# EAGLE board Navigationmark1 (EAGLE 9.6.2)
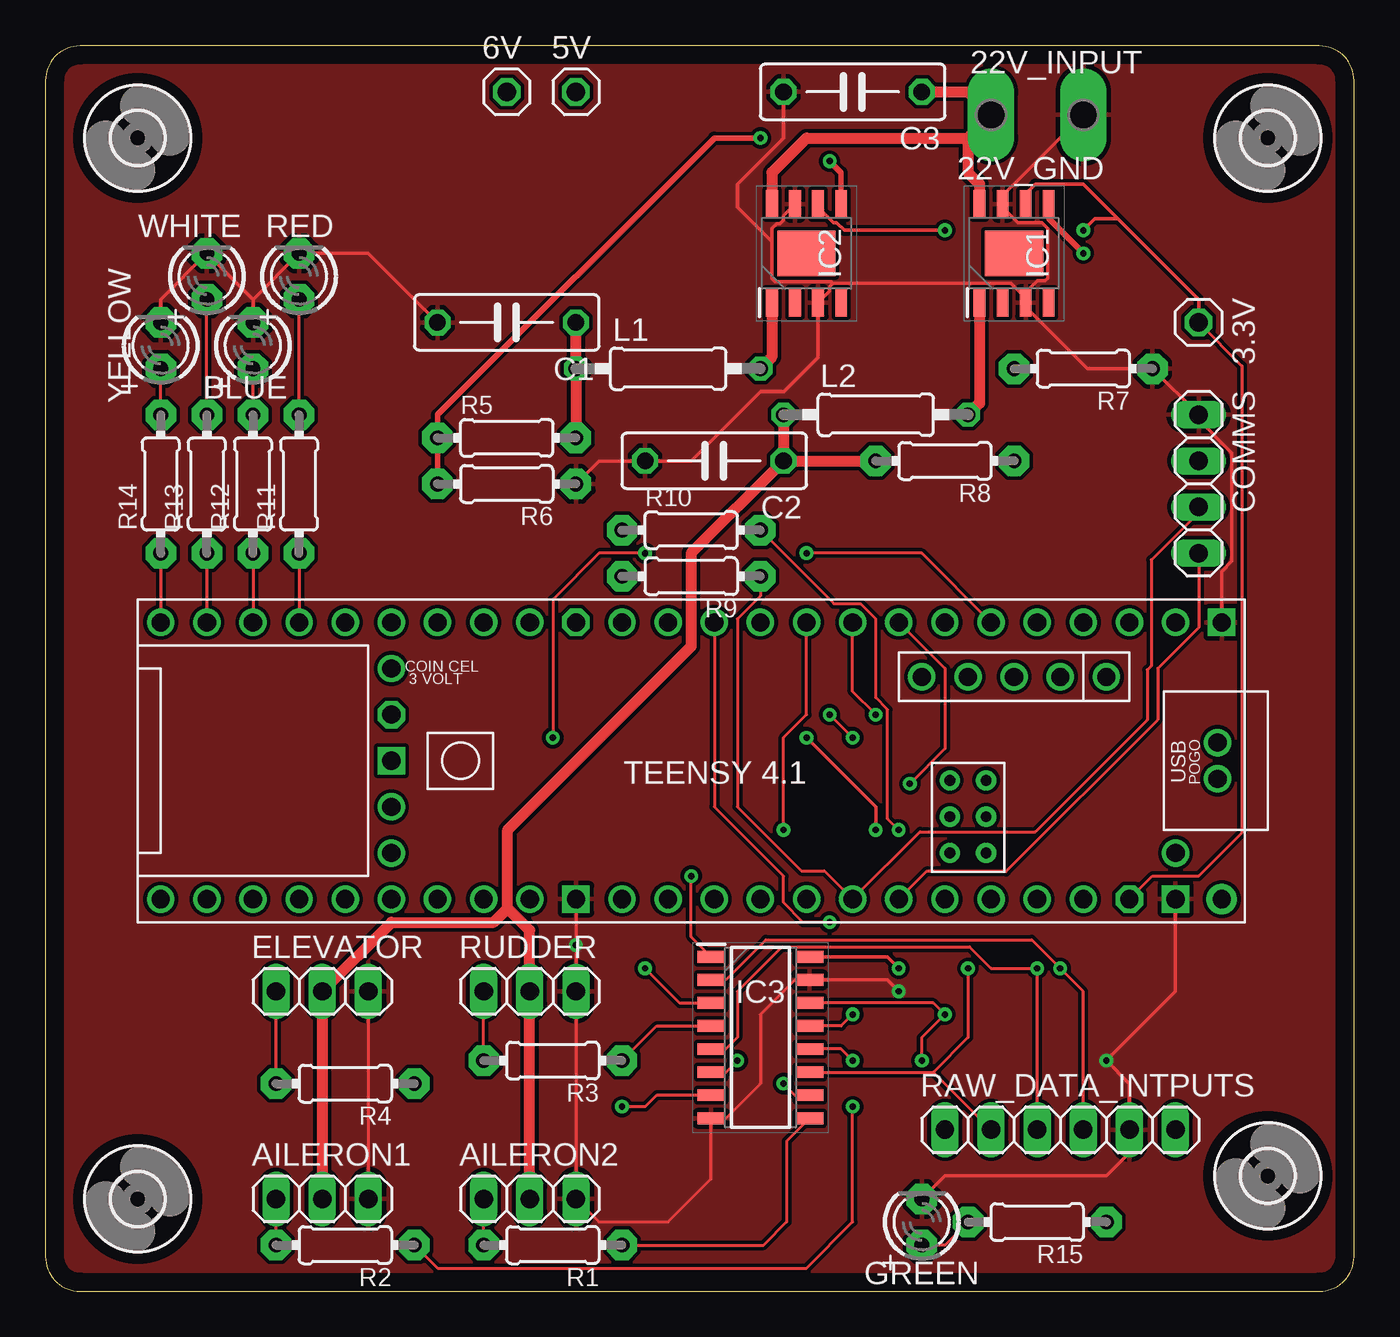
[diagram p0: board, top side]
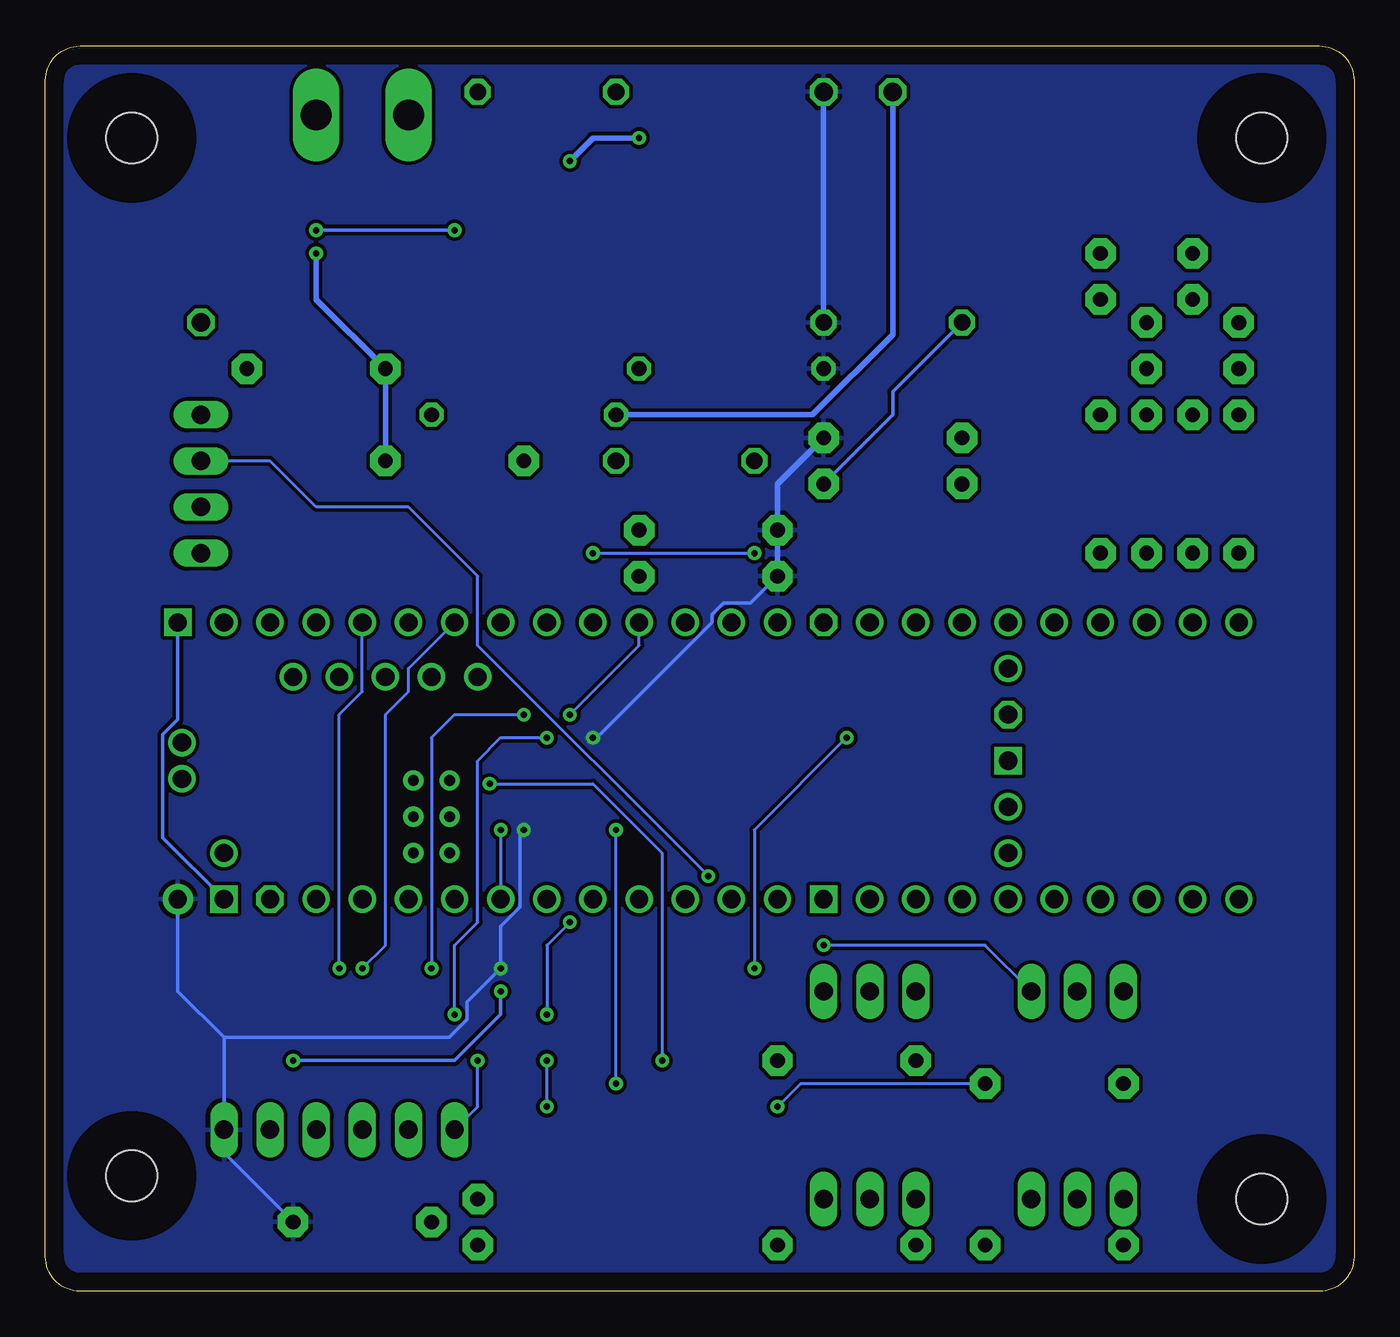
[diagram p1: board, bottom side, seen from below]

Size 72.06 x 68.57 mm. Coordinates in mm from the lower left corner, seen from the top.
Outline: 70.16,68.57 1.9,68.57 arc90 0,66.67 0,1.9 arc90 1.9,0 70.16,0 arc90 72.06,1.9 72.06,66.67 arc90 70.16,68.57
Copper layers (1*16): Top 0.035mm / dielectric 1.5mm / Bottom 0.035mm
Design rules "default *": minimum track width 6mil, minimum drill 0.35mm, track to track 8mil, track to pad 8mil, pad to pad 6mil, via to via 6mil, smd to smd 6mil, copper to edge 40mil, drill to drill 6mil, minimum pad ring 10mil, minimum via ring 8mil, stop-mask expansion 4mil, vias tented up to drill 0mil, thermal gap 10mil

## Footprints (pad centres in the part's own frame; a part is rotated, then mirrored left to right if it is on the bottom)
1X01 = drill 1.016 octagon: 1 0,0
P1-17Y = drill 1.702 pad 2.121 long: TP 0,0
1X03 = drill 1.016 long: 1 -2.54,0; 2 0,0; 3 2.54,0
LED3MM = drill 0.813 pad 1.676 octagon: A -1.27,0; K 1.27,0
C075-032X103 = drill 0.914 octagon: 1 -3.81,0; 2 3.81,0
1X04 = drill 1.016 long: 1 -3.81,0; 2 -1.27,0; 3 1.27,0; 4 3.81,0
SOIC127P600X170-9N = smd 1.525 x 0.65: 1 -2.712,1.905; 2 -2.712,0.635; 3 -2.712,-0.635; 4 -2.712,-1.905; 5 2.712,-1.905; 6 2.712,-0.635; 7 2.712,0.635; 8 2.712,1.905 | smd 2.51 x 3.2: 9 0,0
SOIC127P600X175-16N = smd 1.525 x 0.65: 1 -2.712,4.445; 2 -2.712,3.175; 3 -2.712,1.905; 4 -2.712,0.635; 5 -2.712,-0.635; 6 -2.712,-1.905; 7 -2.712,-3.175; 8 -2.712,-4.445; 9 2.712,-4.445; 10 2.712,-3.175; 11 2.712,-1.905; 12 2.712,-0.635; 13 2.712,0.635; 14 2.712,1.905; 15 2.712,3.175; 16 2.712,4.445
0207/10 = drill 0.813 octagon: 1 -5.08,0; 2 5.08,0
0204/7 = drill 0.813 pad 1.676 octagon: 1 -3.81,0; 2 3.81,0
1X06 = drill 1.016 long: 1 -6.35,0; 2 -3.81,0; 3 -1.27,0; 4 1.27,0; 5 3.81,0; 6 6.35,0
TEENSY41 = drill 1: 0-RX1/CS1/CRX2 -27.94,-7.62; 1-TX1/MISO1/CTX2 -25.4,-7.62; 2-OUT2 -22.86,-7.62; 3-LRCLK2 -20.32,-7.62; 4-BCLK2 -17.78,-7.62; 5-IN2 -15.24,-7.62; 6-OUT1D -12.7,-7.62; 7-RX2/OUT1A -10.16,-7.62; 8-TX2/IN1 -7.62,-7.62; 9-OUT1C -5.08,-7.62; 10-CS\MQSR -2.54,-7.62; 11-MOSI/CTX1 0,-7.62; 12-MISO/MQSL 2.54,-7.62; 13-SCK/LED 2.54,7.62; 14-A0/TX3/SPDIF_OUT 0,7.62; 15-A1/RX3/SPDIF_IN -2.54,7.62; 16-A2/RX4/SCL1 -5.08,7.62; 17-A3/TX4/SDA1 -7.62,7.62; 18-A4/SDA0 -10.16,7.62; 19-A5/SCL0 -12.7,7.62; 20-A6/TX5/LRCLK1 -15.24,7.62; 21-A7/RX5/BCLK1 -17.78,7.62; 22-A8/CTX1 -20.32,7.62; 23-A9/CRX1/MCLK1 -22.86,7.62; 24-A10/TX6/SCL2 7.62,-7.62; 25-A11/RX6/SDA2 10.16,-7.62; 26-A12/MOSI1 12.7,-7.62; 27-A13/SCK1 15.24,-7.62; 28-RX7 17.78,-7.62; 29-TX7 20.32,-7.62; 30-CRX3 22.86,-7.62; 31-CTX3 25.4,-7.62; 32-OUT1B 27.94,-7.62; 33-MCLK2 27.94,7.62; 34-RX8 25.4,7.62; 35-TX8 22.86,7.62; 36-PWM 20.32,7.62; 37-PWM 17.78,7.62; 38-A14/CS/IN1 15.24,7.62; 39-A15/CS/OUT1A 12.7,7.62; 40-A16/CS1 10.16,7.62; 41-A17/MISO1 7.62,7.62; +5V -24.13,-4.62; D+ -30.25,-1; D- -30.25,1; DM -21.59,-4.62; DP -19.05,-4.62; GND4 -16.51,-4.62; GND5 -13.97,-4.62; ON/OFF 15.24,5.08; PROGRAM 15.24,2.54; VBAT 15.24,-5.08; VUSB -27.94,5.08 | drill 1 octagon: 3V3-1 5.08,-7.62; 3V3-2 15.24,-2.54; 3V3-3 -25.4,7.62 | drill 0.6: G -15.51,3.08; LED -17.51,3.08; R+ -17.51,5.08; R- -15.51,5.08; T+ -15.51,1.08; T- -17.51,1.08 | drill 1 square: GND1 -30.48,-7.62; GND2 15.24,0; GND3 5.08,7.62; GND6 -27.94,7.62 | drill 1 pad 1.676: VIN -30.48,7.62
2,8 = hole 2.8: 0,0

## Placement (x,y rotation side)
3.3V  [1X01]  63.5,53.34 270 top
5V  [1X01]  29.21,66.04 0 top
6V  [1X01]  25.4,66.04 0 top
22V_GND  TPPAD1-17Y  [P1-17Y]  57.15,64.77 180 top
22V_INPUT  TPPAD1-17Y  [P1-17Y]  52.07,64.77 0 top
AILERON1  [1X03]  15.24,5.08 0 top
AILERON2  [1X03]  26.67,5.08 0 top
BLUE  [LED3MM]  11.43,52.07 90 top
C1  470uF  [C075-032X103]  25.4,53.34 180 top
C2  470uF  [C075-032X103]  36.83,45.72 180 top
C3  10uF  [C075-032X103]  44.45,66.04 180 top
COMMS  [1X04]  63.5,44.45 270 top
ELEVATOR  [1X03]  15.24,16.51 0 top
GREEN  [LED3MM]  48.26,3.81 90 top
IC1  A5975D  [SOIC127P600X170-9N]  53.34,57.15 90 top
IC2  A5975D  [SOIC127P600X170-9N]  41.91,57.15 90 top
IC3  CD74AC257M96  [SOIC127P600X175-16N]  39.37,13.97 0 top
L1  27uH  [0207/10]  34.29,50.8 0 top
L2  27uH  [0207/10]  45.72,48.26 0 top
R1  220  [0204/7]  27.94,2.54 180 top
R2  220  [0204/7]  16.51,2.54 180 top
R3  220  [0204/7]  27.94,12.7 180 top
R4  220  [0204/7]  16.51,11.43 180 top
R5  1k  [0204/7]  25.4,46.99 0 top
R6  3k  [0204/7]  25.4,44.45 180 top
R7  1.5k  [0204/7]  57.15,50.8 180 top
R8  5.6k  [0204/7]  49.53,45.72 180 top
R9  4.7k  [0204/7]  35.56,39.37 180 top
R10  4.7k  [0204/7]  35.56,41.91 0 top
R11  150  [0204/7]  13.97,44.45 90 top
R12  80  [0204/7]  11.43,44.45 90 top
R13  90  [0204/7]  8.89,44.45 90 top
R14  150  [0204/7]  6.35,44.45 90 top
R15  150  [0204/7]  54.61,3.81 180 top
RAW_DATA_INTPUTS  [1X06]  55.88,8.89 0 top
RED  [LED3MM]  13.97,55.88 90 top
RUDDER  [1X03]  26.67,16.51 0 top
U$1  TEENSY41  [TEENSY41]  34.29,29.21 180 top
U$2  [2,8]  67.31,6.35 0 top
U$3  [2,8]  5.08,5.08 0 top
U$4  [2,8]  5.08,63.5 0 top
U$5  [2,8]  67.31,63.5 0 top
WHITE  [LED3MM]  8.89,55.88 90 top
YELLOW  [LED3MM]  6.35,52.07 90 top

## Library data of the parts
3.3V 5V 6V AILERON1 AILERON2 COMMS ELEVATOR RAW_DATA_INTPUTS RUDDER = pinhead
22V_GND 22V_INPUT = testpad
BLUE C1-C3 GREEN R1-R15 RED WHITE YELLOW = adafruit
IC1 IC2 = A5975D; ARROW_PART_NUMBER: A5975D; ARROW_PRICE-STOCK: https://www.arrow.com/en/products/a5975d/stmicroelectronics; DESCRIPTION: STMICROELECTRONICS - A5975D - DC/DC Boost Regulator, Adjustable, AEC-Q100, 4V to 36V In, 1.235V to 35V/3A Out, 250 kHz, PowerSO-8; HEIGHT: 1.7mm; MANUFACTURER_NAME: STMicroelectronics; MANUFACTURER_PART_NUMBER: A5975D; MOUSER_PART_NUMBER: 511-A5975D; MOUSER_PRICE-STOCK: https://www.mouser.co.uk/ProductDetail/STMicroelectronics/A5975D?qs=LYO3r17CQdO66PebjUe%2FOA%3D%3D
IC3 = CD74AC257M96; DESCRIPTION: Quad 2-Input Non-Inverting Multiplexers with 3-State Outputs; HEIGHT: 1.75mm; MANUFACTURER_NAME: Texas Instruments; MANUFACTURER_PART_NUMBER: CD74AC257M96; MOUSER_PART_NUMBER: 595-CD74AC257M96; MOUSER_PRICE-STOCK: https://www.mouser.com/Search/Refine.aspx?Keyword=595-CD74AC257M96
L1 L2 = rcl; SPICEPREFIX: L
U$1 = teensy
U$2-U$5 = holes

## Nets
3.3V: 3.3V.1 IC1.6 IC2.6 U$1.3V3-3
5V: 5V.1 C1.1 IC3.16 L1.1 R5.2 R9.2 R10.1 R15.1 RAW_DATA_INTPUTS.6 U$1.VIN
6V: 6V.1 AILERON1.2 AILERON2.2 C2.1 ELEVATOR.2 L2.1 R8.2 RUDDER.2
22V: 22V_INPUT.TP C3.1 IC1.8 IC2.8
AILERON1_SIGNAL: IC3.12 R2.1
AILERON2_SIGNAL: IC3.9 R1.1
BLUE_LED: R12.1 U$1.30-CRX3
ELEVATOR_SIGNAL: IC3.7 R4.1
FILTERED_AILERON1: IC3.10 U$1.8-TX2/IN1
FILTERED_AILERON2: IC3.13 U$1.10-CS\MQSR
FILTERED_ELEV: IC3.6 U$1.6-OUT1D
FILTERED_RUD: IC3.3 U$1.4-BCLK2
GND: 22V_GND.TP AILERON1.3 AILERON2.3 BLUE.K C1.2 C2.2 C3.2 COMMS.1 ELEVATOR.3 GREEN.K IC1.3 IC1.7 IC2.3 IC2.7 IC3.8 IC3.15 R6.1 R7.1 RAW_DATA_INTPUTS.5 RED.K RUDDER.3 U$1.GND1 U$1.GND3 U$1.GND6 WHITE.K YELLOW.K
N$1: AILERON1.1 R2.2
N$2: GREEN.A R15.2
N$4: AILERON2.1 R1.2
N$7: R3.2 RUDDER.1
N$8: IC1.1 L2.2
N$9: R11.2 RED.A
N$10: ELEVATOR.1 R4.2
N$11: IC2.1 L1.2
N$12: IC2.5 R5.1 R6.2
N$14: IC1.5 R7.2 R8.1
N$15: BLUE.A R12.2
N$16: R13.2 WHITE.A
N$17: R14.2 YELLOW.A
RAW_AILERON1_DATA: IC3.11 RAW_DATA_INTPUTS.2 U$1.7-RX2/OUT1A
RAW_AILERON2_DATA: IC3.14 RAW_DATA_INTPUTS.1 U$1.9-OUT1C
RAW_ELEV_DATA: IC3.5 RAW_DATA_INTPUTS.3 U$1.5-IN2
RAW_RUD_DATA: IC3.2 RAW_DATA_INTPUTS.4 U$1.3-LRCLK2
RED_LED: R11.1 U$1.29-TX7
RUDDER_SIGNAL: IC3.4 R3.1
SCL: COMMS.4 R10.2 U$1.19-A5/SCL0
SDA: COMMS.3 R9.1 U$1.18-A4/SDA0
SELECT_PIN: COMMS.2 IC3.1
WHITE_LED: R13.1 U$1.31-CTX3
YELLOW_LED: R14.1 U$1.32-OUT1B

## Tracks (layer width: path | path; a pad name or v marks a point on that pad's centre or on a via)
3.3V  (via drill 0.35)
  Top 0.152: 3.3V.1 65.89,50.95 65.89,25.25 63.5,22.86 60.96,22.86 U$1.3V3-3
  Top 0.203: IC1.6 53.98,60.43 54.51,60.96 57.15,60.96 59.05,59.06 | 3.3V.1 63.5,54.61 59.05,59.06 | v49.53,58.42 43.99,58.42 43.56,58.84 43.38,58.84 42.54,59.69 IC2.6 | v57.15,58.42 57.79,59.06 59.05,59.06
  Bottom 0.203: v49.53,58.42 v57.15,58.42
5V  (via drill 0.35)
  Top 0.203: v41.91,30.48 45.72,26.67 v45.72,25.4 | v46.99,17.78 46.35,18.41 IC3.16
  Top 0.61: C1.1 L1.1 R5.2
  Bottom 0.203: R9.2 33.23,37.89 34.73,37.89 35.35,37.27 35.35,36.81 41.68,30.48 v41.91,30.48 | v45.72,25.4 45.93,25.19 45.93,21.15 46.99,20.09 v46.99,17.78 48.85,15.92 48.85,14.96 49.83,13.97 62.23,13.97 | 62.23,13.97 RAW_DATA_INTPUTS.6 62.23,7.62 R15.1 | U$1.VIN 64.77,16.51 62.23,13.97
  Bottom 0.305: C1.1 5V.1 | R5.2 31.75,44.45 R9.2 R10.1
  pour Bottom: 70.48,68.58 1.9,68.58 arc90 0,66.67 0,1.9 arc90 1.9,0 70.48,0 arc90 72.39,1.9 72.39,66.67 arc90
6V
  Top 0.61: L2.1 C2.1 | C2.1 R8.2 | AILERON1.2 ELEVATOR.2 19.05,20.32 24.69,20.32 25.46,21.09 | AILERON2.2 RUDDER.2 26.67,19.88 25.46,21.09 | 25.46,21.09 25.46,25.4 35.56,35.5 35.56,40.64 C2.1
  Bottom 0.305: L2.1 29.82,48.26 25.4,52.68 6V.1
22V
  Top 0.61: IC2.8 40.01,61.59 41.91,63.5 50.8,63.5 | C3.1 50.8,66.04 22V_INPUT.TP 50.8,63.5 | IC1.8 51.43,60.96 50.8,61.59 50.8,63.5
AILERON1_SIGNAL  (via drill 0.35)
  Top 0.152: R2.1 21.59,1.27 41.91,1.27 44.45,3.81 v44.45,10.16 | IC3.12 43.81,13.34 v44.45,12.7
  Bottom 0.152: v44.45,10.16 v44.45,12.7
AILERON2_SIGNAL
  Top 0.152: R1.1 39.54,2.54 40.81,3.81 40.81,8.25 IC3.9
BLUE_LED
  Top 0.152: R12.1 U$1.30-CRX3
ELEVATOR_SIGNAL  (via drill 0.35)
  Top 0.152: IC3.7 33.65,10.79 33.02,10.16 v31.75,10.16
  Bottom 0.152: R4.1 30.48,11.43 v31.75,10.16
FILTERED_AILERON1  (via drill 0.35)
  Top 0.152: U$1.8-TX2/IN1 41.91,31.75 40.64,30.48 v40.64,25.4 | v40.64,11.43 41.27,10.79 IC3.10
  Bottom 0.152: v40.64,11.43 v40.64,25.4
FILTERED_AILERON2  (via drill 0.35)
  Top 0.152: U$1.10-CS\MQSR 36.83,26.67 40.64,22.86 40.64,21.4 41.72,20.32 v43.18,20.32 | v44.45,15.24 43.81,14.61 IC3.13
  Bottom 0.152: v43.18,20.32 44.45,19.05 v44.45,15.24
FILTERED_ELEV  (via drill 0.35)
  Top 0.152: U$1.6-OUT1D 49.53,34.29 49.53,29.87 v47.6,27.94 | v38.1,12.7 37.46,12.07 IC3.6
  Bottom 0.152: v47.6,27.94 41.91,27.94 38.1,24.13 v38.1,12.7
FILTERED_RUD  (via drill 0.35)
  Top 0.152: U$1.4-BCLK2 48.26,40.64 v41.91,40.64 | v33.02,40.64 30.48,40.64 27.94,38.1 v27.94,30.48 | v33.02,17.78 34.92,15.88 IC3.3
  Bottom 0.152: v41.91,40.64 v33.02,40.64 | v27.94,30.48 33.02,25.4 v33.02,17.78
GND  (via drill 0.35)
  Top 0.152: 52.7,59.72 IC1.7 | ELEVATOR.3 AILERON1.3 | IC3.15 41.27,17.14 39.37,15.24 39.37,11.43 37.46,9.52 IC3.8 36.66,6.18 34.29,3.81 30.48,3.81 AILERON2.3 RUDDER.3 v29.21,19.05 U$1.GND3 | 53.98,54.26 54.12,54.12
  Top 0.203: IC1.7 52.7,60.33 22V_GND.TP | C3.2 40.64,63.5 38.1,60.96 38.1,59.69 40.01,57.78 | 53.98,54.58 IC1.3 | 53.89,54.35 54.12,54.12 | IC1.3 53.98,55.01 | 53.98,55.01 54.61,55.64 55.04,55.64 55.19,55.79 55.19,58.51 54.86,58.84 53.54,58.84 52.7,59.69 52.7,59.72 | R6.1 30.48,45.72 C2.2 35.56,45.72 39.37,49.53 40.66,49.53 42.54,51.41 IC2.3 43.18,55.08 43.18,55.33 43.36,55.51 | C1.2 17.78,57.15 RED.K 11.43,54.61 | 11.43,54.61 BLUE.K | 11.43,54.61 WHITE.K 6.35,54.61 YELLOW.K | IC1.3 53.98,54.26 53.98,54.19 57.36,50.8 R7.1 COMMS.1 63.5,47.99 65.33,46.16 65.33,40.2 64.77,39.64 U$1.GND1 | U$1.GND6 62.23,16.51 v58.42,12.7 59.69,11.43 RAW_DATA_INTPUTS.5 59.69,7.62 58.42,6.35 49.53,6.35 GREEN.K | IC3.15 46.35,17.14 v46.99,16.51 | 53.98,55.01 53.66,55.01 53.16,55.51 43.36,55.51 | 43.36,55.51 43.28,55.59 40.18,55.59 40.01,55.77 40.01,57.78 | IC2.7 40.63,59.22 40.63,58.97 40.46,58.8 40.27,58.8 40.01,58.53 40.01,57.78
  Bottom 0.152: ELEVATOR.3 20.32,19.05 v29.21,19.05
  Bottom 0.203: C1.2 25.4,49.53 25.4,48.26 R6.1 | U$1.GND1 64.77,31.48 65.6,30.65 65.6,24.96 U$1.GND6 | v58.42,12.7 49.53,12.7 46.99,15.24 v46.99,16.51
  pour Top: 0,1.9 0,66.67 arc-90 1.9,68.58 70.48,68.58 arc-90 72.39,66.67 72.39,1.9 arc-90 70.48,0 1.9,0 arc-90
N$1
  Top 0.152: R2.2 AILERON1.1
N$2
  Top 0.152: R15.2 49.53,2.54 GREEN.A
N$4
  Top 0.152: R1.2 AILERON2.1
N$7
  Top 0.152: R3.2 RUDDER.1
N$8
  Top 0.61: IC1.1 51.43,48.89 L2.2
N$9
  Top 0.152: R11.2 RED.A
N$10
  Top 0.152: R4.2 ELEVATOR.1
N$11
  Top 0.61: IC2.1 40.01,51.44 L1.2
N$12  (via drill 0.35)
  Top 0.305: R6.2 R5.1 21.59,48.26 36.83,63.5 v39.37,63.5 | v43.18,62.23 43.81,61.59 IC2.5
  Bottom 0.305: v39.37,63.5 41.91,63.5 v43.18,62.23
N$14  (via drill 0.35)
  Top 0.305: v57.15,57.15 55.24,59.06 IC1.5
  Bottom 0.305: R8.1 R7.2 57.15,54.61 v57.15,57.15
N$15
  Top 0.152: R12.2 BLUE.A
N$16
  Top 0.152: R13.2 WHITE.A
N$17
  Top 0.152: R14.2 YELLOW.A
RAW_AILERON1_DATA  (via drill 0.35)
  Top 0.152: v45.72,31.75 44.45,33.02 U$1.7-RX2/OUT1A | v50.8,17.78 50.8,13.97 48.9,12.07 | RAW_DATA_INTPUTS.2 48.9,12.07 | 48.9,12.07 48.87,12.04 43.18,12.04 43.16,12.07 IC3.11
  Bottom 0.152: v50.8,17.78 50.8,30.48 49.53,31.75 v45.72,31.75
RAW_AILERON2_DATA  (via drill 0.35)
  Top 0.152: IC3.14 48.9,15.88 v49.53,15.24 48.26,13.97 v48.26,12.7 | v44.45,30.48 v43.18,31.75
  Bottom 0.152: v44.45,30.48 46.99,30.48 48.26,29.21 48.26,20.32 49.53,19.05 v49.53,15.24 | v43.18,31.75 39.37,35.56 U$1.9-OUT1C | RAW_DATA_INTPUTS.1 48.26,10.16 v48.26,12.7
RAW_ELEV_DATA  (via drill 0.35)
  Top 0.152: IC3.5 37.46,13.34 38.1,13.97 38.1,16.51 40.56,18.97 50.88,18.97 52.07,17.78 v54.61,17.78 RAW_DATA_INTPUTS.3
  Bottom 0.152: U$1.5-IN2 52.07,34.29 52.07,33.02 53.34,31.75 53.34,19.05 v54.61,17.78
RAW_RUD_DATA  (via drill 0.35)
  Top 0.152: IC3.2 37.46,17.14 39.67,19.36 54.3,19.36 v55.88,17.78 57.15,16.51 RAW_DATA_INTPUTS.4
  Bottom 0.152: U$1.3-LRCLK2 54.61,33.02 55.88,31.75 v55.88,17.78
RED_LED
  Top 0.152: R11.1 U$1.29-TX7
RUDDER_SIGNAL
  Top 0.152: IC3.4 33.65,14.61 R3.1
SCL  (via drill 0.35)
  Top 0.152: U$1.19-A5/SCL0 48.5,23.1 52.89,23.1 61.25,31.46 61.25,34.29 63.5,36.54 COMMS.4 | R10.2 43.42,37.86 44.88,37.86 45.72,37.02 45.72,32.68 46.38,32.02 46.38,26.01 v46.99,25.4
  Bottom 0.152: v46.99,25.4 U$1.19-A5/SCL0
SDA
  Top 0.152: R9.1 39.37,38.29 38.1,37.02 38.1,26.67 41.62,23.15 42.89,23.15 U$1.18-A4/SDA0 48.16,25.3 54.51,25.3 60.67,31.46 60.67,34.22 60.89,34.44 60.89,40.27 63.5,42.88 COMMS.3
SELECT_PIN  (via drill 0.35)
  Top 0.152: IC3.1 35.56,19.51 v35.56,22.86
  Bottom 0.152: COMMS.2 59.69,45.72 57.15,43.18 52.07,43.18 48.26,39.37 48.26,35.56 v35.56,22.86
WHITE_LED
  Top 0.152: R13.1 U$1.31-CTX3
YELLOW_LED
  Top 0.152: R14.1 U$1.32-OUT1B